# Altium PCB PCB1.PcbDoc
Units mm, origin at the board's own origin, x right, y up, seen from the top; angles counter-clockwise.
Board outline 78.61 x 72.26 mm, 2 copper layers (Top Layer, Bottom Layer); 15 components, 15 nets, 49 pads, 0 vias.
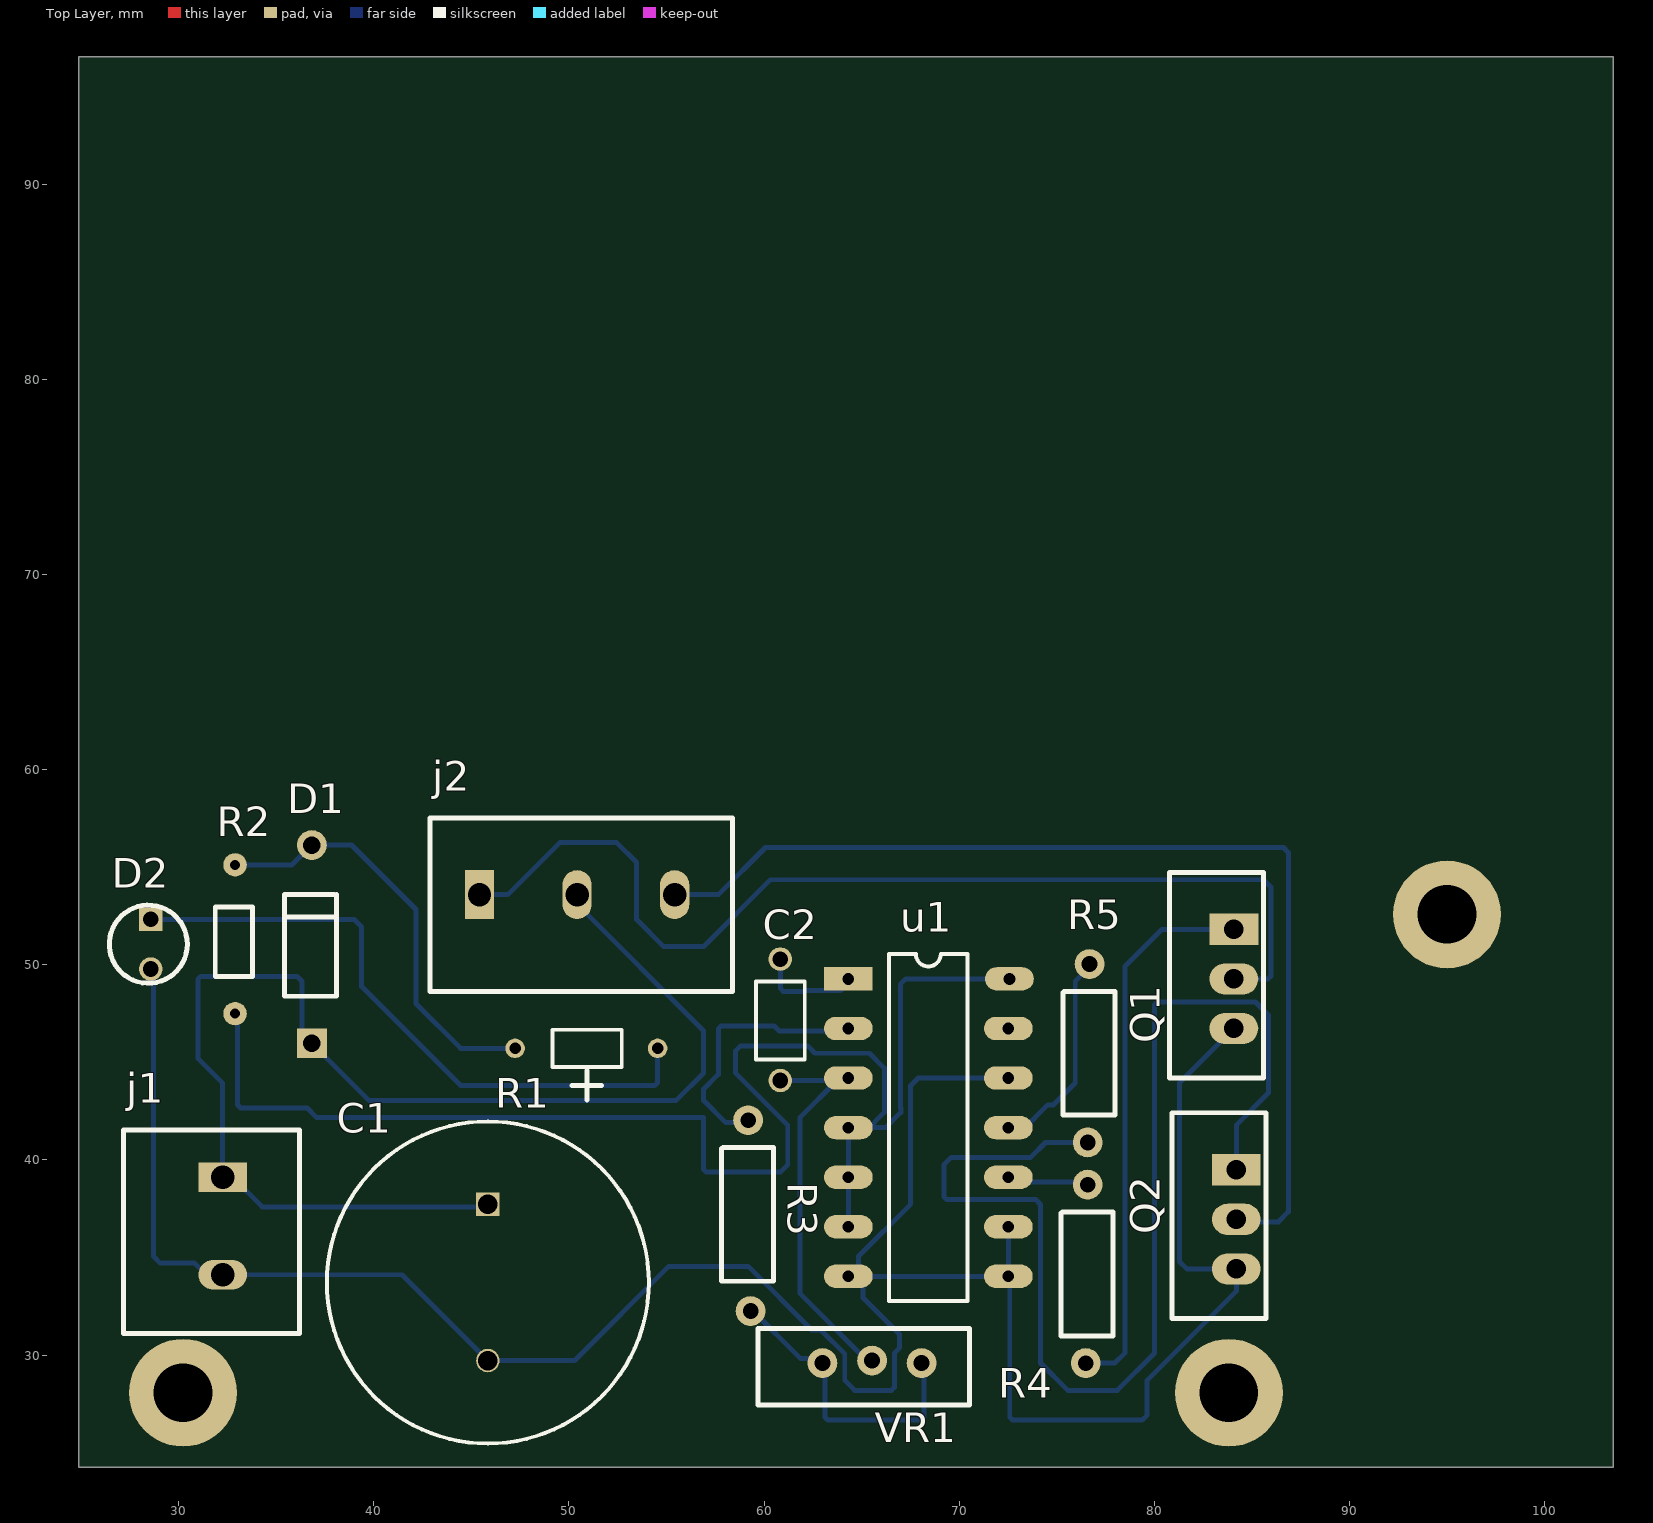
[diagram p0: Top Layer view]
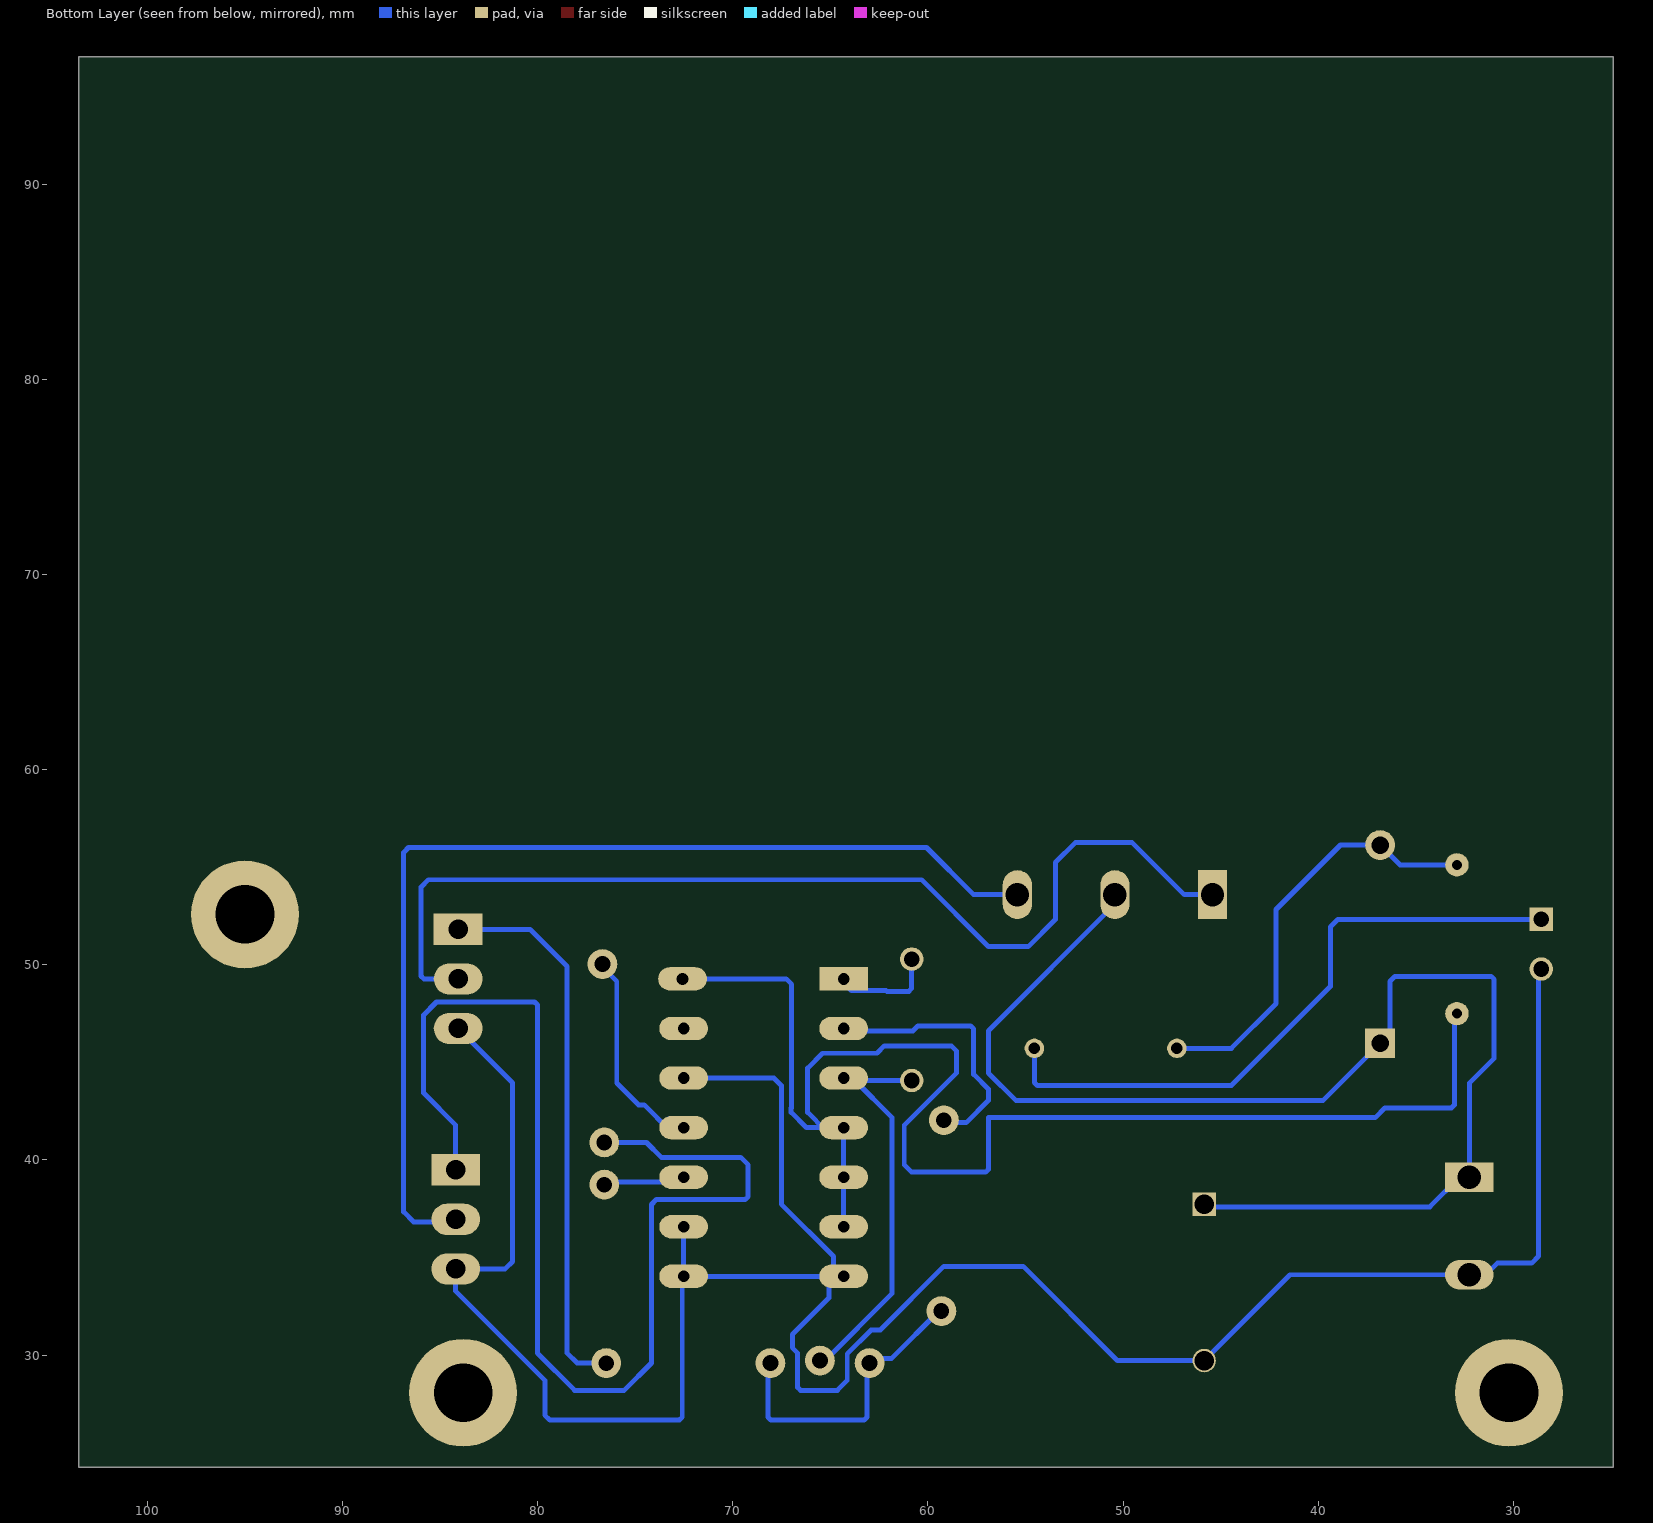
[diagram p1: Bottom Layer view, seen from below]
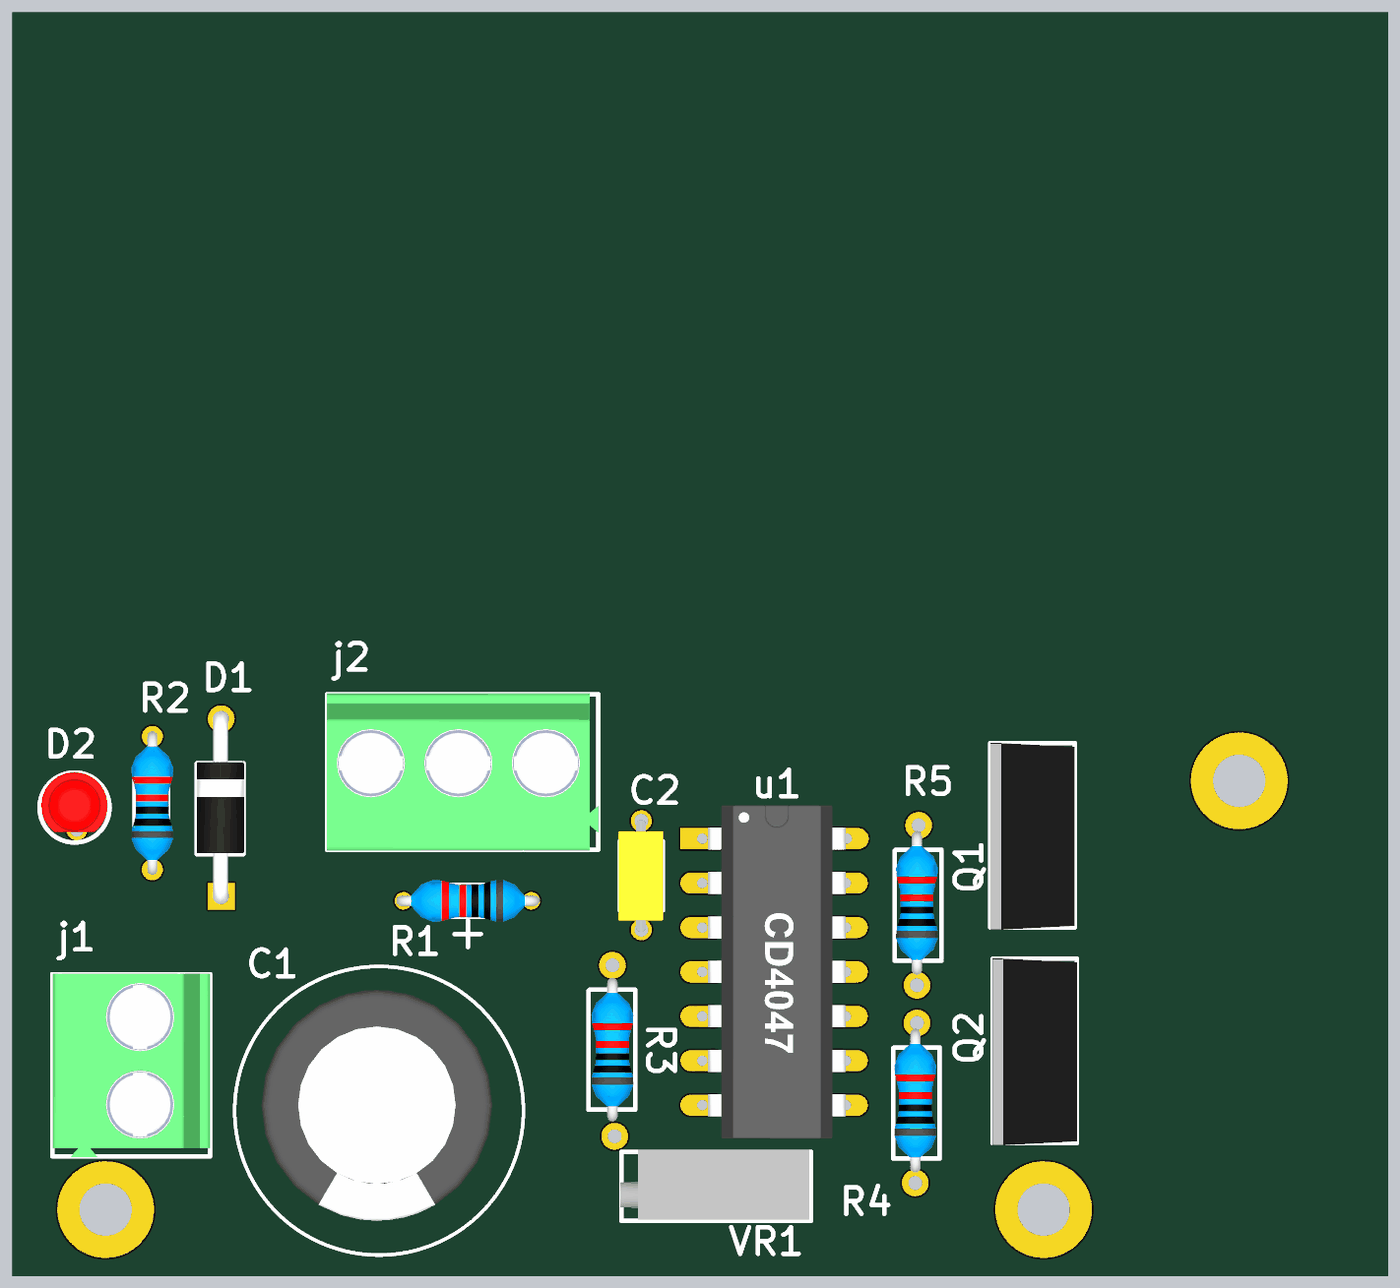
[diagram p2: 3D render of the assembled board from above, using the file's embedded part models]

## Layer stack, top to bottom
Top Solder: solder mask 0.0102, Solder Resist, Dk 3.5
Top Layer: signal copper 0.0356
Dielectric 1: dielectric 0.32, FR-4, Dk 4.8
Bottom Layer: signal copper 0.0356
Bottom Solder: solder mask 0.0102, Solder Resist, Dk 3.5

## Board outline
24.892,24.257 103.505,24.257 103.505,96.52 24.892,96.52

## Design rules (kind name [scope] priority, off if disabled: settings)
Clearance [All] p1: gap=0.254 ignorepadtopadclearanceinfootprint=FALSE except(0: Arc-Hole Track-Hole SMDPad-Hole THPad-Hole Via-Hole Fill-Hole Poly-Hole Region-Hole Text-Hole)
PolygonConnect [All] p1: connectstyle=Relief reliefconductorwidth=0.254 reliefentries=4 polygonreliefangle="90 Angle" airgapwidth=0.254
RoutingVias [All] p1: holewidth=0.711 width=1.27 viastyle="Through Hole" minholewidth=0.711 minwidth=1.27 maxholewidth=0.711 maxwidth=1.27
SolderMaskExpansion [All] p1: expansion=0.102
Width [All] p1: maxlimit=0.254 minlimit=0.254 preferedwidth=0.254
30 further rules are at their usual default settings.

## Components (designator, comment, footprint, x,y, rotation, side; value= is the part's Value field where it differs from the comment)
C1 "2200uF" 2200uF_35V_Ely_TH 45.847,37.719 r270 top
C2 "0.01uF" "0.01uF_cer_th_C - duplicate1" 60.833,49.149 r90 top
D1 "D1" 1N4007_TH_D 36.767,48.387 r270 top (schematic designator 1)
D2 "LED_3mm_red_TH" LED_red_TH 28.575,52.324 r270 top (schematic designator indicator)
j1 "2P_5mm_TH" 2pin_5mm_TH 32.385,35.687 r0 top
j2 "3pin_5mm_TH" 3pin_5mm_TH 45.419,53.594 r90 top
Q1 "IRF540ZLPBF" IRF540_TH_MOS 85.979,49.53 r0 top
Q2 "IRF540ZLPBF" IRF540_TH_MOS 86.106,37.211 r0 top
R1 "1k" 1k_0.25_th_R 49.149,45.72 r180 top
R2 "R_330_0.25W_TH" 330ohm_th_R 33.02,52.959 r90 top
R3 "390k" 390ohm_0.25w_th_R 59.182,40.64 r90 top
R4 "220" 220ohm_0.25_th_R 76.581,37.338 r90 top
R5 "220" 220ohm_0.25_th_R 76.678,48.641 r90 top
u1 "CD4047BE IC" CD4047_TH_IC 64.317,49.276 r0 top
VR1 "VR_1K_trim_20T" 1k_var_th_R 65.786,29.337 r0 top

## Footprints (in the part's own frame and the unit in brackets; to place one, negate y for a bottom-side part, rotate by r counter-clockwise, add the part's x,y. Pads: shape width x height; smd on the part's side, far side on the other; paste and mask are expansions set on the pad)
"0.01uF_cer_th_C - duplicate1" [mm]
  round 1.2 hole 0.8: 1(-5.08,0) 2(1.143,0)
  silkscreen extent -4,-1.25 0,1.25, body extent -5.2,-1.25 1.2,1.3, height 9.58
1k_0.25_th_R [mm]
  round 1 hole 0.6: 1(1.905,0) 2(-5.397,0)
  silkscreen extent -3.56,-0.95 0,0.95, body extent -5.89,-1.2 2.33,1.2, height 3.2
1k_var_th_R [mil]
  round 60 hole 31.89: 1(90,10) 2(-10,15) 3(-110,10)
  silkscreen extent -240,-75 187,80, body extent -242,-73 182,85, height 429
1N4007_TH_D [mil]
  rect 60x60 hole 35.43: 1(95,2.5)
  round 60 hole 35.43: 2(-305,2.5)
  silkscreen extent -205,-53 0,52, body extent -322,-53 112,55, height 146
2pin_5mm_TH [mm]
  rect 2.5x1.5 hole 1.2: 1(-0.127,3.429)
  oval 2.5x1.5 hole 1.2: 2(-0.127,-1.571)
  silkscreen extent -5.21,-4.57 3.81,5.84, body extent -5.19,-4.61 3.81,5.88, height 13.5
3pin_5mm_TH [mm]
  rect 2.5x1.5 hole 1.2: 1(0,0)
  oval 2.5x1.5 hole 1.2: 2(0,-5) 3(0,-10)
  silkscreen extent -4.95,-12.95 3.94,2.54, body extent -5.01,-12.96 3.99,2.54, height 13.5
220ohm_0.25_th_R [mil]
  round 60 hole 31.5: 1(55,0) 2(-305,3.82)
  silkscreen extent -250,-51 0,54, body extent -282,-44 42,51, height 126
330ohm_th_R [mm]
  round 1.2 hole 0.5: 1(-5.461,0.127) 2(2.159,0.127)
  silkscreen extent -3.56,-0.76 0,1.14, body extent -5.76,-1.08 2.46,1.33, height 3.2
390ohm_0.25w_th_R [mil]
  round 60 hole 31.5: 1(-330,-5) 2(55,0)
  silkscreen extent -270,-51 0,54, body extent -297,-47 27,47, height 126
2200uF_35V_Ely_TH [mm]
  rect 1.2x1.2 hole 1: 1(0,0)
  round 1.2 hole 1: 2(8,0)
  silkscreen extent -6.86,-8.25 12.25,8.25, body extent -2.92,-6.72 10.28,6.48, height 26.4
CD4047_TH_IC [mm]
  rect 2.5x1.2 hole 0.6: 1(0,0)
  oval 2.5x1.2 hole 0.6: 2(0,-2.54) 3(0,-5.08) 4(0,-7.62) 5(0,-10.16) 6(0,-12.7) 7(0,-15.24) 8(8.2,-15.24) 9(8.2,-12.7) 10(8.2,-10.16) 11(8.2,-7.62) 12(8.2,-5.08) 13(8.2,-2.54) 14(8.255,0)
  silkscreen extent 2.08,-16.51 6.11,1.27, body extent 0.33,-17.14 8.2,1.91, height 4.15
IRF540_TH_MOS [mm]
  rect 2.5x1.6 hole 1: 1(-1.905,2.286)
  oval 2.5x1.6 hole 1: 2(-1.905,-0.254) 3(-1.905,-2.794)
  silkscreen extent -5.21,-5.33 -0.38,5.21, body extent -5.21,-5.46 -0.38,5.21, height 23.26
LED_red_TH [mm]
  rect 1.2x1.2 hole 0.8: 1(0,0)
  round 1.2 hole 0.8: 2(2.54,0)
  silkscreen extent -0.73,-2.12 3.27,1.87, body extent -0.76,-2.03 2.67,1.77, height 6.14

## Part data
C1: library part C_2200uF_Ely_35V_TH, "Aluminum Electrolytic Capacitor, Polarized, Aluminum (wet), 35V, 20% +Tol, 20% -Tol, 2200uF, Through Hole Mount", Capacitance=2.2mF, Case/Package=Radial, Dielectric Material=Aluminium, ESR (Equivalent Series Resistance)=121mR, Manufacturer 1="CDE Illinois Capacitor", Manufacturer Part Number 1=228CKR035M, Max Operating Temperature=85°C, Min Operating Temperature=-40°C, Package Quantity=50, Ripple Current=2.09A, Tolerance=20%, Voltage Rating=35V, Category="Aluminum Electrolytic Capacitors", ComponentLink1Description=https://datasheet.ciiva.com/16819/ckr-cks-16819885.pdf?src-supplier=Future+Electronics, ComponentLink1URL=https://datasheet.ciiva.com/16819/ckr-cks-16819885.pdf?src-supplier=Future+Electronics, Diameter=16mm, Height=31.5mm, Height - Seated (Max)=1.24inch, Lead Free="Lead Free", Lead Pitch=0.295inch, Life (Hours)=2000Hour, Mount="Through Hole", Packaging=Bulk, Polarity=Polar, Pricing 1="1=1.52000, 10=1.20100, 50=1.04060, 100=0.90040, 500=0.68034, 1000=0.60030, 2500=0.56028, 5000=0.54027 (USD)", REACH SVHC="No SVHC", RoHS=Yes, Stock 1=3987, Supplier 1=Digi-Key, Voltage Rating (DC)=35V
C2: library part C_0.01uF_Cer_50V_TH, "Capacitor Ceramic 0.01uF 50V C0G 5% 5mm T/R", Capacitance=10nF, Case/Package=Radial, Manufacturer 1=TDK, Manufacturer Part Number 1=FA28NP01H103JNU06, Max Operating Temperature=150°C, Min Operating Temperature=-55°C, Ratings=AEC-Q200, Tolerance=5%, Voltage Rating=50V, Category="Ceramic Capacitors", ComponentLink1Description=https://product.tdk.com/info/en/catalog/datasheets/leadmlcc_halogenfree_fa150_en.pdf?src-supplier=Digi-Key, ComponentLink1URL=https://product.tdk.com/info/en/catalog/datasheets/leadmlcc_halogenfree_fa150_en.pdf?src-supplier=Digi-Key, Features="High Temperature", Height - Seated (Max)=0.217inch, Lead/Base Style=Kinked, Lead Pitch=0.197inch, Length=0.157inch, Mount="Through Hole", Packaging="Tape and Reel", Pricing 1="1=0.48000, 10=0.33700, 50=0.25500, 100=0.22220, 500=0.16456, 1000=0.13988 (USD)", RoHS=Yes, RoHS Compliant=Yes, Stock 1=2762, Supplier 1=Digi-Key, Width=0.098inch
D1: library part D_1N400_th, "Diode Switching 1KV 1A 2-Pin DO-41 T/R", Average Rectified Current=1A, Capacitance=8pF, Case/Package=DO-41, Forward Voltage=1V, Manufacturer 1=Diodes, Manufacturer Part Number 1=1N4007G-T, Max Operating Temperature=175°C, Max Repetitive Reverse Voltage (Vrrm)=1kV, Max Reverse Current=5uA, Max Surge Current=30A, Min Operating Temperature=-65°C, Package Quantity=5000, Category="Rectifier Diodes", ComponentLink1Description=https://datasheet.ciiva.com/36525/1537942-36525995.pdf?src-supplier=Jameco, ComponentLink1URL=https://datasheet.ciiva.com/36525/1537942-36525995.pdf?src-supplier=Jameco, ComponentLink2Description=https://datasheet.ciiva.com/15219/getdatasheetpartid-213960-15219547.pdf?src-supplier=Verical, ComponentLink2URL=https://datasheet.ciiva.com/15219/getdatasheetpartid-213960-15219547.pdf?src-supplier=Verical, ComponentLink3Description=https://datasheet.ciiva.com/25947/ds29002-25947029.pdf?src-supplier=Avnet+Europe, ComponentLink3URL=https://datasheet.ciiva.com/25947/ds29002-25947029.pdf?src-supplier=Avnet+Europe, ComponentLink4Description=https://datasheet.ciiva.com/912/ds29002-912230.pdf?src-supplier=Digi-Key, ComponentLink4URL=https://datasheet.ciiva.com/912/ds29002-912230.pdf?src-supplier=Digi-Key, ComponentLink5Description=https://datasheet.ciiva.com/16395/ds29002-16395514.pdf?src-supplier=Future+Electronics, ComponentLink5URL=https://datasheet.ciiva.com/16395/ds29002-16395514.pdf?src-supplier=Future+Electronics, Current Rating=1A, Element Configuration=Single, Forward Current=1A, Height=2.71mm, Lead Free="Lead Free", Length=4.7mm, Max Reverse Voltage (DC)=1kV, Mount="Through Hole", Number of Pins=2, Output Current=1A, Packaging="Tape and Reel", Peak Non-Repetitive Surge Current=30A, Polarity=Standard, Pricing 1="1=0.30000, 10=0.24800, 100=0.13170, 500=0.08662, 1000=0.05890, 2000=0.05313 (USD)", Radiation Hardening=No, Recovery Time=2us, Reverse Recovery Time=2us, Reverse Voltage (DC)=1kV, RoHS=Yes, RoHS Compliant=Yes, Series=-, Stock 1=97269, Supplier 1=Digi-Key, Voltage Rating (DC)=1kV, Weight=0.010582oz, Width=2.71mm
D2: Manufacturer 1=SunLED, Manufacturer Part Number 1=XLMDK34D, Category=LEDs, Pricing 1="1=0.38000, 10=0.30000, 100=0.13470, 500=0.12168, 1000=0.09996, 2000=0.08692, 5000=0.07823, 10000=0.06954, 25000=0.06519 (USD)", RoHS=No, Stock 1=8826, Supplier 1=Digi-Key
j1: "TERM BLOCK PLUG 2POS 90DEG 5MM", Color=Black, Current=15A, Manufacturer 1="On-Shore Technology", Manufacturer Part Number 1=OSTTH020100, Max Operating Temperature=115°C, Min Operating Temperature=-40°C, Voltage=300V, Category="Terminal Blocks", ComponentLink1Description=http://www.on-shore.com/wp-content/uploads/2015/09/ostthxx0160.pdf?src-supplier=Digi-Key, ComponentLink1URL=http://www.on-shore.com/wp-content/uploads/2015/09/ostthxx0160.pdf?src-supplier=Digi-Key, Contact Plating=Nickel, Mount="Free Hanging", Number of Levels=1, Number of Pins=2, Number of Positions=2, Number of Positions Per Level=2, Packaging=Bulk, Pitch=0.197inch, Pricing 1="1=0.86000, 10=0.53400, 25=0.45680, 50=0.41080, 100=0.40220, 250=0.34232, 500=0.32518, 1000=0.29096, 5000=0.22820 (USD)", RoHS=Yes, RoHS Compliant=No, Series=OSTTH, Stock 1=527, Supplier 1=Digi-Key, Termination=Screw, Wire Gauge (Max)=22AWG, Wire Gauge (Min)=14AWG
j2: "Connector Terminal Blocks Female 3 Position 5mm Screw Straig", Color=Blue, Current=15A, Flammability Rating="UL94 V-0", Manufacturer 1="On-Shore Technology", Manufacturer Part Number 1=OSTTH030160, Max Operating Temperature=105°C, Min Operating Temperature=-30°C, Package Quantity=1, Voltage=300V, Category="Terminal Blocks", ComponentLink1Description=https://datasheet.ciiva.com/794/ostthxx0160-794896.pdf?src-supplier=Digi-Key, ComponentLink1URL=https://datasheet.ciiva.com/794/ostthxx0160-794896.pdf?src-supplier=Digi-Key, ComponentLink2Description=https://datasheet.ciiva.com/19475/164806-19475818.pdf?src-supplier=Jameco, ComponentLink2URL=https://datasheet.ciiva.com/19475/164806-19475818.pdf?src-supplier=Jameco, Contact Material=Brass,Steel, Depth=13.6mm, Height=11mm, Housing Color=Blue, Housing Material=Thermoplastic, Lead Free="Lead Free", Length=15.7mm, Max Current Rating=15A, Mount="Free Hanging,Cable", Number of Contacts=3, Number of Levels=1, Number of Positions=3, Number of Positions Per Level=3, Number of Rows=1, Orientation=Straight, Packaging=Bulk, Pitch=0.197inch, Pricing 1="1=1.09000, 10=0.76300, 25=0.71120, 50=0.64540, 100=0.64260, 250=0.54264, 500=0.51408, 1000=0.45696, 5000=0.38080 (USD)", RoHS=Yes, RoHS Compliant=Yes, Series=OSTTH, Stock 1=37899, Supplier 1=Digi-Key, Termination=Screw, Width=13.6mm, Wire Gauge (Max)=22AWG, Wire Gauge (Min)=14AWG
Q1 Q2: "Mosfet, Power; N-ch; Vdss 100V; Rds(on) 21MILLIOHMS; Id 36A; TO-262; Pd 92W; Vgs +/-20", Case/Package=TO-262, Continuous Drain Current (ID)=36A, Drain to Source Breakdown Voltage=100V, Drain to Source Resistance=26.5mR, Gate to Source Voltage (Vgs)=20V, Input Capacitance=1.77nF, Manufacturer 1=Infineon, Max Operating Temperature=175°C, Max Power Dissipation=92W, Min Operating Temperature=-55°C, Category=MOSFETs, ComponentLink1Description=https://www.alliedelec.com/m/d/23899d70707f5ac9a5c306f9e15d4494.pdf?src-supplier=Allied+Electronics, ComponentLink1URL=https://www.alliedelec.com/m/d/23899d70707f5ac9a5c306f9e15d4494.pdf?src-supplier=Allied+Electronics, ComponentLink2Description=http://www.infineon.com/dgdl/irf540zpbf.pdf?fileId=5546d462533600a4015355e3af7d19a6&src-supplier=Digi-Key, ComponentLink2URL=http://www.infineon.com/dgdl/irf540zpbf.pdf?fileId=5546d462533600a4015355e3af7d19a6&src-supplier=Digi-Key, Drain to Source Voltage (Vdss)=100V, Halogen Free="Halogen Free", Height=0.38inch, Lead Free="Contains Lead", Length=0.42inch, Manufacturer Part Number 1=IRF540ZLPBF, Max Dual Supply Voltage=100V, Mount="Through Hole", Number of Pins=3, Packaging=Rail/Tube, Power Dissipation=92W, Pricing 1="1=1.59000, 10=1.42500, 100=1.11120, 500=0.91792, 1000=0.80520 (USD)", Rds On Max=26.5mR, RoHS=Yes, RoHS Compliant=Yes, Stock 1=947, Supplier 1=Digi-Key, Turn-Off Delay Time=43ns, Turn-On Delay Time=15ns, Width=0.19inch
R1: library part R_1K_0.25W_TH, "TE Connectivity CFR16 Series Axial Carbon Film Resistor 1k 5% 0.25W -1200  0ppm/C", Case/Package=Axial, Manufacturer 1="TE Connectivity", Manufacturer Part Number 1=CFR16J1K0, Max Operating Temperature=155°C, Max Power Dissipation=250mW, Min Operating Temperature=-55°C, Number of Resistors=1, Resistance=1kR, Resistance Tolerance=5%, Resistor Type="Thin Film", Temperature Coefficient=0ppm/°C, Voltage Rating=200V, Category="Through-Hole Resistors", ComponentLink1Description=https://datasheet.ciiva.com/11823/0900766b80098b49-11823166.pdf?src-supplier=RSComponents, ComponentLink1URL=https://datasheet.ciiva.com/11823/0900766b80098b49-11823166.pdf?src-supplier=RSComponents, ComponentLink2Description=https://datasheet.ciiva.com/24428/eng-ds-1773195-d-24428424.pdf?src-supplier=Onlinecomponents.com, ComponentLink2URL=https://datasheet.ciiva.com/24428/eng-ds-1773195-d-24428424.pdf?src-supplier=Onlinecomponents.com, ComponentLink3Description=https://datasheet.ciiva.com/22664/1723854-22664943.pdf?src-supplier=Element14, ComponentLink3URL=https://datasheet.ciiva.com/22664/1723854-22664943.pdf?src-supplier=Element14, Diameter=1.85mm, ELV=Compliant, Length=3.5mm, Mount=Axial, Number of Terminations=2, Packaging="Cut Tape", Power Rating=250mW, Pricing 1="1=0.10000, 10=0.07900, 25=0.05440, 50=0.04240, 100=0.03020, 250=0.02360, 500=0.01876, 1000=0.01331 (USD)", Radiation Hardening=No, REACH SVHC="No SVHC", RoHS=Yes, RoHS Compliant=Yes, Series="CFR16, Neohm", Stock 1=4940, Supplier 1=Digi-Key, Technology="CARBON FILM", Termination=Axial, Tolerance=5%, Voltage Rating (DC)=200V
R2: "TE Connectivity CFR16 Series Axial Carbon Film Resistor 330 5% 0.25W -1200  0ppm/C", Case/Package=Conformal, Manufacturer 1="TE Connectivity", Manufacturer Part Number 1=CFR16J330RJIT, Max Operating Temperature=155°C, Min Operating Temperature=-55°C, Power Rating=250mW, Resistance=330R, Temperature Coefficient=0ppm/°C, Tolerance=5%, ComponentLink1Description=https://datasheet.ciiva.com/11823/0900766b80098b49-11823361.pdf?src-supplier=RSComponents, ComponentLink1URL=https://datasheet.ciiva.com/11823/0900766b80098b49-11823361.pdf?src-supplier=RSComponents, Diameter=1.85mm, Length=3.5mm, RoHS=Yes, Stock 1=1, Supplier 1=RSComponents, Termination=Axial
R3: library part R_390K_0.25W_TH, "RES 390K OHM 1/4W 5% AXIAL", Case/Package=Axial, Manufacturer 1=Yageo, Manufacturer Part Number 1=CFR-25JB-52-390K, Max Operating Temperature=155°C, Max Power Dissipation=250mW, Min Operating Temperature=-55°C, Package Quantity=200, Resistance=390kR, Resistor Type="Carbon Film", Temperature Coefficient=-700ppm/°C, Tolerance=5%, Category="Through-Hole Resistors", ComponentLink1Description=https://datasheet.ciiva.com/2713/yageolr-cfr-2013-2713170.pdf?src-supplier=Digi-Key, ComponentLink1URL=https://datasheet.ciiva.com/2713/yageolr-cfr-2013-2713170.pdf?src-supplier=Digi-Key, Lead Free="Lead Free", Length=0.248inch, Number of Terminations=2, Packaging=Bulk, Pricing 1="1=0.10000, 10=0.06700, 25=0.04640, 50=0.03600, 100=0.02580, 250=0.02008, 500=0.01596, 1000=0.01133, 5000=0.00876 (USD)", RoHS=Yes, RoHS Compliant=Yes, Series=CFR, Stock 1=11679, Supplier 1=Digi-Key
R4 R5: library part R_220_0.25W_TH, "RES 220 OHM 1/4W 5% AXIAL", Case/Package=Conformal, Manufacturer 1="Stackpole Electronics", Manufacturer Part Number 1=CF14JT220R, Max Operating Temperature=155°C, Max Power Dissipation=250mW, Min Operating Temperature=-55°C, Package Quantity=1, Resistance=220R, Resistor Type="Carbon Film", Temperature Coefficient=-400ppm/°C, Tolerance=5%, Category="Through-Hole Resistors", ComponentLink1Description=https://www.seielect.com/catalog/SEI-Packaging.pdf?src-supplier=Digi-Key, ComponentLink1URL=https://www.seielect.com/catalog/SEI-Packaging.pdf?src-supplier=Digi-Key, ComponentLink2Description=https://www.seielect.com/catalog/SEI-CF_CFM.pdf?src-supplier=Avnet, ComponentLink2URL=https://www.seielect.com/catalog/SEI-CF_CFM.pdf?src-supplier=Avnet, ComponentLink3Description=https://www.verical.com/server-webapp/html/getDatasheet?partID=375100&src-supplier=Verical, ComponentLink3URL=https://www.verical.com/server-webapp/html/getDatasheet?partID=375100&src-supplier=Verical, ComponentLink4Description=http://components.arrow.com/part/dataview/44988614S316465N1174?src-supplier=Arrow+Electronics, ComponentLink4URL=http://components.arrow.com/part/dataview/44988614S316465N1174?src-supplier=Arrow+Electronics, Construction=Cylindrical, Contact Plating=Tin,Matte, Diameter=2.3mm, Features="Flame Retardant Coating", Lead Free="Lead Free", Length=6.5mm, Military Standard=Not, Mount="Through Hole,Axial", Number of Terminations=2, Packaging="Tape and Reel", Power Rating=250mW, Pricing 1="1=0.10000, 10=0.03600, 25=0.02640, 50=0.02000, 100=0.01480, 250=0.01124, 500=0.00900, 1000=0.00662 (USD)", Radiation Hardening=No, RoHS=Yes, RoHS Compliant=Yes, Series=CF, Stock 1=142794, Supplier 1=Digi-Key, Termination=Axial
u1: "MONO/ASTABLE MULTIVIBRATOR, 125NS, DIP-14; Multivibrator Type:Monostable / Astable; Output Current:6.8A; Supply Voltage Min:3V; Supply Voltage Max:18V; Logic Case Style:DIP; No. of Pins:14; Propagation Delay:125ns; Packaging:Each ;RoHS Compliant: Yes", Case/Package=DIP, High Level Output Current=-4.2mA, Input Capacitance=5pF, Low Level Output Current=4.2mA, Manufacturer 1="Texas Instruments", Manufacturer Part Number 1=CD4047BE, Max Operating Temperature=125°C, Max Power Dissipation=500mW, Max Supply Current=20uA, Max Supply Voltage=18V, Min Operating Temperature=-55°C, Min Supply Voltage=3V, Operating Supply Voltage=12V, Output Current=6.8mA, Package Quantity=25, Category="Logic ICs", ComponentLink1Description=https://datasheet.ciiva.com/14134/cd4047b-eng-tds-14134622.pdf?src-supplier=Distrelec, ComponentLink1URL=https://datasheet.ciiva.com/14134/cd4047b-eng-tds-14134622.pdf?src-supplier=Distrelec, ComponentLink2Description=https://datasheet.ciiva.com/27050/894331-27050683.pdf?src-supplier=Jameco, ComponentLink2URL=https://datasheet.ciiva.com/27050/894331-27050683.pdf?src-supplier=Jameco, ComponentLink3Description=https://datasheet.ciiva.com/15095/getdatasheetpartid-72002-15095147.pdf?src-supplier=Verical, ComponentLink3URL=https://datasheet.ciiva.com/15095/getdatasheetpartid-72002-15095147.pdf?src-supplier=Verical, ComponentLink4Description=https://datasheet.ciiva.com/41455/001015487-da-01-en-ic-mono-astbl-multi-cd4047be-pdip-14-tid-41455405.pdf?src-supplier=Conrad, ComponentLink4URL=https://datasheet.ciiva.com/41455/001015487-da-01-en-ic-mono-astbl-multi-cd4047be-pdip-14-tid-41455405.pdf?src-supplier=Conrad, ComponentLink5Description=https://datasheet.ciiva.com/29297/173223-da-01-en-c-mos-ic-cd-4047-be-dip14-tid-29297339.pdf?src-supplier=Conrad, ComponentLink5URL=https://datasheet.ciiva.com/29297/173223-da-01-en-c-mos-ic-cd-4047-be-dip14-tid-29297339.pdf?src-supplier=Conrad, ComponentLink6Description=https://datasheet.ciiva.com/1509/1830980-1509169.pdf?src-supplier=Element14, ComponentLink6URL=https://datasheet.ciiva.com/1509/1830980-1509169.pdf?src-supplier=Element14, ComponentLink7Description=https://datasheet.ciiva.com/1885/cd4047b-1885142.pdf?src-supplier=Digi-Key, ComponentLink7URL=https://datasheet.ciiva.com/1885/cd4047b-1885142.pdf?src-supplier=Digi-Key, ComponentLink8Description=https://datasheet.ciiva.com/3305/cd4047b-3305349.pdf?src-supplier=Avnet, ComponentLink8URL=https://datasheet.ciiva.com/3305/cd4047b-3305349.pdf?src-supplier=Avnet, ComponentLink9Description=https://datasheet.ciiva.com/26242/cd4047b-26242053.pdf?src-supplier=Avnet+Europe, ComponentLink9URL=https://datasheet.ciiva.com/26242/cd4047b-26242053.pdf?src-supplier=Avnet+Europe, Contact Plating=Gold, Height=4.57mm, Independent Circuits=1, Lead Free="Lead Free", Length=19.3mm, Logic Function=Multivibrator, Mount="Through Hole", Number of Bits=1, Number of Circuits=1, Number of Elements=1, Number of Pins=14, Packaging=Rail/Tube, Power Dissipation=500mW, Pricing 1="1=0.74000, 10=0.64700, 25=0.60800, 100=0.49610, 250=0.46084, 500=0.39220, 1000=0.32375 (USD)", Propagation Delay=125ns, Quiescent Current=20uA, Radiation Hardening=No, REACH SVHC="No SVHC", RoHS=Yes, Schmitt Trigger Input=No, Stock 1=117, Supplier 1=Digi-Key, Turn-On Delay Time=300ns, Weight=0.032734oz, Width=6.35mm
VR1: "TRIMMER 1K OHM 1W PC PIN", Manufacturer 1=Bourns, Manufacturer Part Number 1=3290H-1-102M, Max Operating Temperature=150°C, Max Power Dissipation=1W, Min Operating Temperature=-65°C, Package Quantity=50, Resistance=1kR, Resistor Type=Wirewound, Temperature Coefficient=50ppm/°C, Tolerance=5%, Category="Variable Resistors and Potentiometers", ComponentLink1Description=https://datasheet.ciiva.com/2165/3290-2165858.pdf?src-supplier=Digi-Key, ComponentLink1URL=https://datasheet.ciiva.com/2165/3290-2165858.pdf?src-supplier=Digi-Key, ComponentLink2Description=https://datasheet.ciiva.com/16813/3290-16813453.pdf?src-supplier=Avnet+Europe, ComponentLink2URL=https://datasheet.ciiva.com/16813/3290-16813453.pdf?src-supplier=Avnet+Europe, Contact Plating=Gold, Depth=6.1mm, Height=0.375inch, Length=17.78mm, Military Standard=Not, Mount="PCB,Through Hole,Panel", Number of Turns=25, Packaging=Rail/Tube, Power Rating=1W, Pricing 1="50=38.65400 (USD)", RoHS=Yes, RoHS Compliant=Yes, Series="Trimpot® 3290 - Sealed", Supplier 1=Digi-Key, Taper=Linear, Termination=Pin, Weight=0.025oz

## Free pads (board coordinates)
  round 5.524 hole 3: ""(30.226,28.067) ""(83.82,28.067) ""(94.996,52.578)

## Nets (pads, with @x,y where several pads share a name; then routed paths per layer and width w, separated by ;. In a path a pad name is that pad's centre, name@x,y a point inside that pad or via, vN(x,y) a via of type N, cw(c..) or ccw(c..) an arc to the next point about the centre after c; other vN are vias at no path point)
+12: C1.1 D1.1 j1.1 j2.2 | length 67.7
  Bottom Layer w0.254: D1.1@36.386,45.593 D1.1@36.512,45.72 ; C1.1@45.72,37.592 34.282,37.592 32.758,39.116 j1.1 32.258,43.936 30.988,45.206 30.988,49.254 31.137,49.403 36.068,49.403 36.322,49.149 36.322,46.482 D1.1 39.751,43.053 55.499,43.053 56.896,44.45 56.896,46.617 50.419,53.094 j2.2 ; C1.1 C1.1@45.974,37.846
"+12 driver": D1.2 R1.1 R2.2 | length 22.1
  Bottom Layer w0.254: R2.2 35.814,55.118 D1.2 36.83,56.007 36.957,56.134 38.862,56.134 42.164,52.832 42.164,48.006 44.45,45.72 R1.1
GND: C1.2 D2.2 j1.2 Q1.3 Q2.3 u1.7 u1.8 u1.9 u1.12 | length 133.7
  Bottom Layer w0.254: D2.2 28.702,49.657 28.702,35.074 29.062,34.714 30.823,34.714 31.421,34.116 j1.2 41.45,34.116 C1.2 50.293,29.719 55.118,34.544 59.182,34.544 62.438,31.288 62.911,31.288 64.135,30.064 64.135,28.702 64.643,28.194 66.526,28.194 66.675,28.343 66.675,30.099 66.951,30.375 66.951,31.058 65.081,32.928 u1.7@65.081,33.472 ; u1.7 u1.7@64.403,34.036 ; u1.12@72.195,44.196 u1.12 67.895,44.196 67.514,43.815 67.514,37.735 64.84,35.062 64.84,34.473 u1.7@64.403,34.036 ; u1.9 u1.8 u1.7@64.403,34.036 ; u1.8@72.589,33.909 72.589,26.819 72.738,26.67 79.375,26.67 79.629,26.924 79.629,28.702 84.201,33.274 Q2.3 81.661,34.417 81.28,34.798 81.28,43.942 83.366,46.028 83.366,46.114 83.988,46.736 Q1.3
NetC2_1: C2.1 u1.3 VR1.2 | length 21.1
  Bottom Layer w0.254: C2.1 63.667,44.069 63.739,44.069 61.849,42.179 61.849,33.147 65.278,29.718 VR1.2 ; u1.3@63.667,44.196 63.739,44.196 u1.3 64.403,44.196 u1.3@64.84,44.633
NetC2_2: C2.2 u1.1 | length 5.3
  Bottom Layer w0.254: C2.2 60.833,48.79 60.982,48.641 62.106,48.641 62.141,48.676 63.916,48.676 u1.1@64.389,49.149
Netindicator_1: D2.1 R1.2 | length 33.1
  Bottom Layer w0.254: D2.1 38.989,52.324 39.37,51.943 39.37,48.895 44.45,43.815 54.398,43.815 54.546,43.964 R1.2
Netj2_1: j2.1 Q1.2 | length 54.9
  Top Layer w0.254: j2.1 j2.1@45.419,54.094
  Bottom Layer w0.254: j2.1@45.419,54.094 j2.1 46.863,53.594 49.53,56.261 52.451,56.261 53.467,55.245 53.467,52.324 54.864,50.927 56.896,50.927 60.325,54.356 85.598,54.356 85.979,53.975 85.979,49.425 85.83,49.276 Q1.2 Q1.2@84.201,49.149
Netj2_3: j2.3 Q2.2 | length 53.9
  Bottom Layer w0.254: j2.3 57.658,53.594 60.071,56.007 86.614,56.007 86.868,55.753 86.868,37.338 86.36,36.83 84.328,36.83 Q2.2
NetQ1_1: Q1.1 R4.2 | length 28.9
  Bottom Layer w0.254: R4.2@76.484,29.464 R4.2 77.978,29.591 78.486,30.099 78.486,49.911 80.391,51.816 Q1.1 Q1.1@83.82,52.07
NetQ2_1: Q2.1 R5.2 | length 62.6
  Bottom Layer w0.254: R5.2 74.422,40.894 73.66,40.132 69.596,40.132 69.215,39.751 69.215,38.122 69.364,37.973 73.914,37.973 74.168,37.719 74.168,29.591 75.565,28.194 78.105,28.194 80.01,30.099 80.01,47.946 80.159,48.095 85.179,48.095 85.852,47.422 85.852,43.434 84.201,41.783 Q2.1
NetR2_1: R2.1 u1.4 u1.5 u1.6 u1.14 | length 76.7
  Bottom Layer w0.254: R2.1 33.02,47.371 33.02,42.821 33.169,42.672 36.576,42.672 37.084,42.164 56.896,42.164 56.896,39.519 57.045,39.37 60.833,39.37 61.214,39.751 61.214,41.783 58.547,44.45 58.547,45.593 58.801,45.847 62.23,45.847 62.611,45.466 65.405,45.466 66.167,44.704 66.167,42.44 u1.4@65.256,41.529 ; u1.6@64.967,36.576 u1.6 u1.5 u1.4 65.184,41.656 66.222,41.656 ; u1.4@65.256,41.656 66.222,41.656 ; u1.14 67.26,49.276 66.984,49 66.984,42.672 67.006,42.65 67.006,42.44 66.222,41.656
NetR3_1: R3.1 VR1.1 VR1.3 | length 15.6
  Bottom Layer w0.254: R3.1 59.436,32.258 61.86,29.834 62.749,29.834 VR1.3 63.119,29.464 63.119,26.819 63.268,26.67 68.05,26.67 68.199,26.819 68.199,29.464 VR1.1
NetR3_2: R3.2 u1.2 | length 13.7
  Bottom Layer w0.254: R3.2 59.055,41.91 58.039,41.91 56.896,43.053 56.896,43.624 57.658,44.386 57.658,46.714 57.807,46.863 60.518,46.863 60.772,46.609 u1.2@64.389,46.609
"Q output": R4.1 u1.10 | length 4.7
  Bottom Layer w0.254: u1.10@72.39,39.37 72.476,39.37 72.667,39.179 72.581,39.179 u1.10 ; u1.10@72.589,38.989 72.716,38.862 76.454,38.862 R4.1 ; R4.1@76.517,39.052 R4.1@76.581,39.116
"Q\ output": R5.1 u1.11 | length 11.6
  Bottom Layer w0.254: u1.11 72.857,41.656 u1.11@73.294,42.093 ; u1.11@72.929,41.529 73.239,41.529 74.536,42.826 74.83,42.826 75.946,43.942 75.946,49.154 76.678,49.886 R5.1 R5.1@76.551,50.165
pads on no net: u1.13